# Allegro board pcb.brd
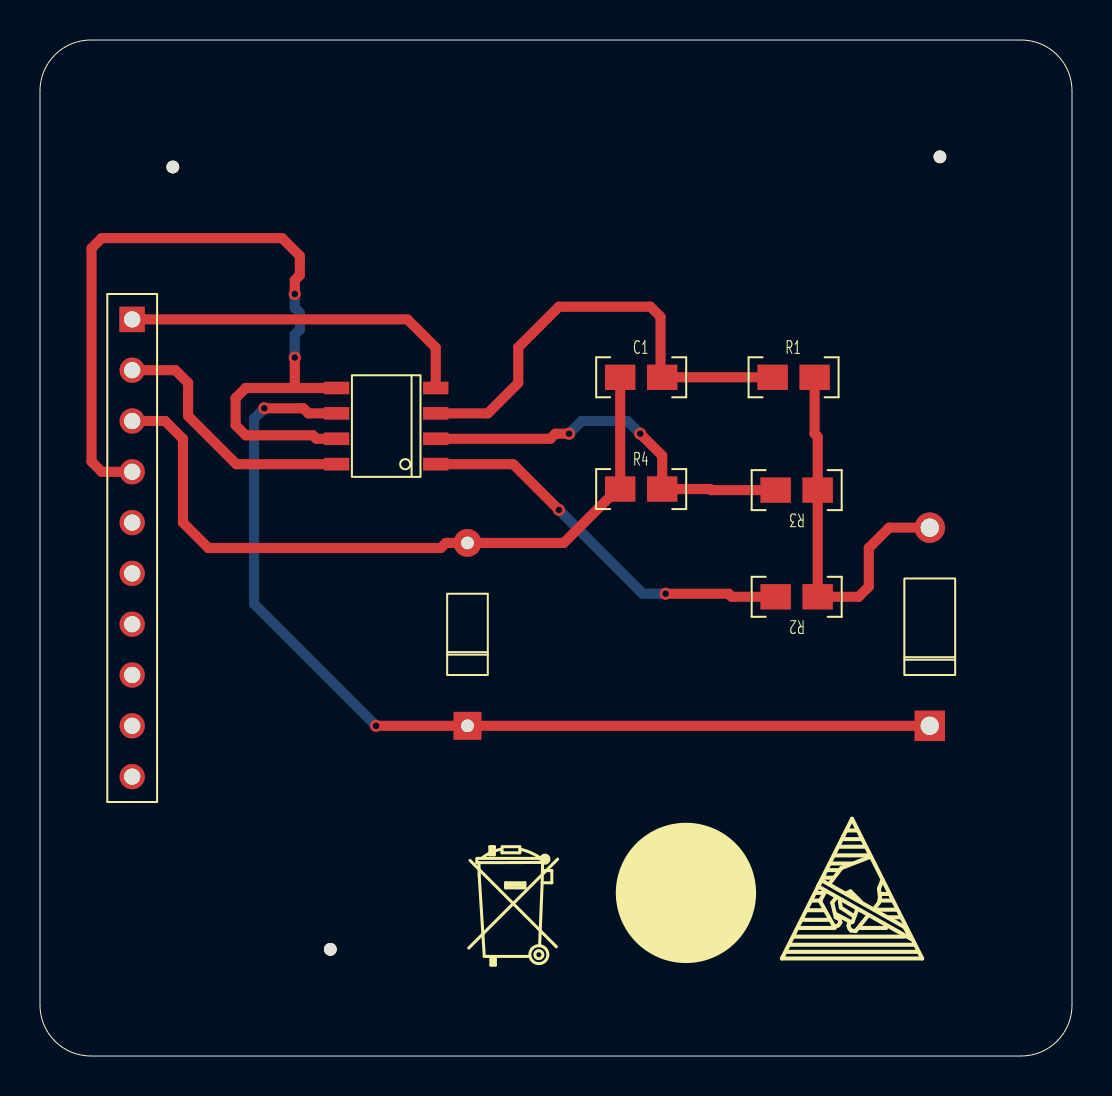
[diagram p0: board, top side]
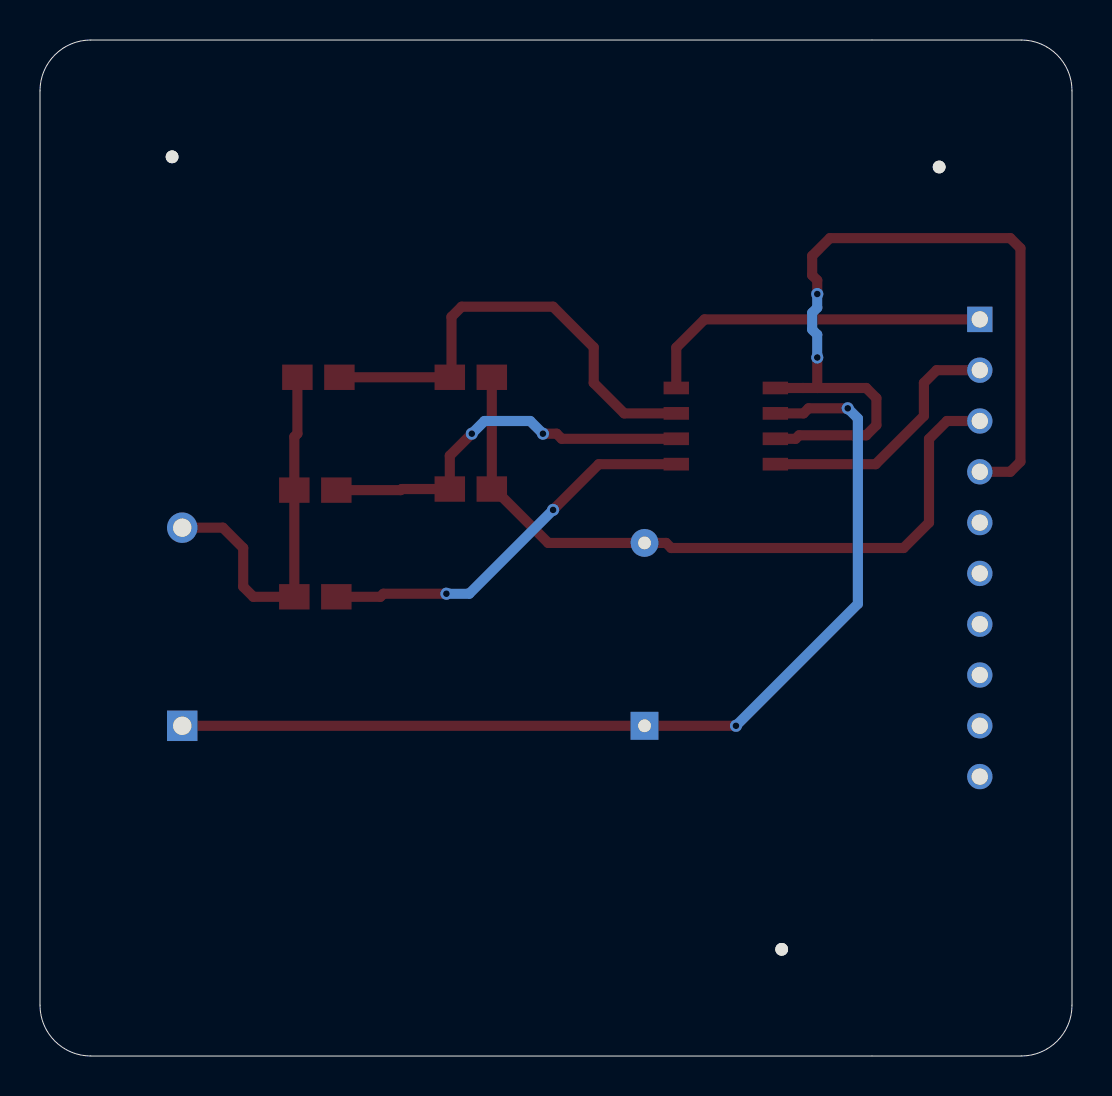
[diagram p1: board, bottom side, seen from below]

Outline 51.6 x 50.8 mm; copper layers: TOP, BOTTOM. Coordinates in mm from the lower left corner of the outline.
Outline path: 0,48.26 arc(0.74,50.06) 2.54,50.8 49.06,50.8 arc(50.86,50.06) 51.6,48.26 51.6,2.54 arc(50.86,0.74) 49.06,0 2.54,0 arc(0.74,0.74) 0,2.54 0,48.26

## Placement (name value [footprint] x y rotation side)
C1  0.1u  [0805]  30.01 34.04 0 top
D1  D1N5819/ON  [DO41-1]  44.49 16.51 0 top
D2  1n5231/ON  [DO35-1]  21.37 16.51 0 top
J1  HEADER 10  [666]  4.61 36.83 0 top
NOREF  -  []  26.2 7.62 0 top
NOREF#2  -  [unnamed#2]  45 44.96 0 top
NOREF#3  -  []  39.92 7.87 0 top
NOREF#4  -  [unnamed#2]  14.52 5.33 0 top
NOREF#5  -  []  32.8 8.38 0 top
NOREF#6  -  [unnamed#2]  6.64 44.45 0 top
R1  4.7k  [0805]  37.63 34.04 0 top
R2  330  [0805]  37.88 22.86 180 top
R3  100k  [0805]  37.88 28.19 180 top
R4  125591  [0805]  30.01 28.45 0 top
U1  LM2904  [SOIC8]  17.31 31.5 180 top

## Library data of the parts
C1 = C
D1 = D1N5819/ON_0
D2 = 1n5231/ON_1
J1 = HEADER 10
R1-R4 = R
U1 = LM2904: Tolerance: ***; User Part Number: ***

## Footprints (pads in the part's own frame, mm; a bottom-side part is the same pattern mirrored in y, then rotated)
666
  rect 1.27x1.27 hole 0.813: 1(0,0)
  round 1.27 hole 0.813: 2(0,-2.54) 3(0,-5.08) 4(0,-7.62) 5(0,-10.16) 6(0,-12.7) 7(0,-15.24) 8(0,-17.78) 9(0,-20.32) 10(0,-22.86)
0805
  rect 1.524x1.27 smd: 1(-1,-0.1) 2(1.1,-0.1)
DO35-1
  round 1.397 hole 0.635: 1(0,9.144)
  rect 1.397x1.397 hole 0.635: 2(0,0)
DO41-1
  round 1.524 hole 0.914: 1(0,9.906)
  rect 1.524x1.524 hole 0.914: 2(0,0)
SOIC8
  rect 1.27x0.635 smd: 1(-2.477,1.905) 2(-2.477,0.635) 3(-2.477,-0.635) 4(-2.477,-1.905) 5(2.477,-1.905) 6(2.477,-0.635) 7(2.477,0.635) 8(2.477,1.905)
unnamed#2
  round 0.635 hole 3.175 unplated: (0,0)

## Nets
0: C1.1 D2.1 J1.3 R4.1
+7.5: J1.1 U1.4(V-)
-7.5: J1.2 U1.8(V+)
OUT_800HZ: J1.4 U1.5(+IN) U1.7(OUT)
N64431: C1.2 R1.1 U1.3(+IN)
N64483: R3.2 R4.2 U1.2(-IN)
N64493: D1.1 R1.2 R2.1 R3.1
N64497: D1.2 D2.2 U1.6(-IN)
N64667: J1.5
N64673: J1.6
N64679: J1.7
N64685: J1.8
N64691: J1.9
N64697: J1.10
N65470: R2.2 U1.1(OUT)

## Via types
v1: diameter 0.61, hole 0.33, TOP to BOTTOM, 8 vias

## Routing (per net, layer and track width the routed paths; a pad name or vN(x,y) marks a point on that pad's centre or on a via; arc(x,y) is an arc through that point)
0: length 36.3
  TOP w0.508: C1.1 R4.1 28.88,28.35 26.19,25.65 D2.1 20.29,25.65 20.04,25.4 8.42,25.4 7.15,26.67 7.15,30.85 6.25,31.75 J1.3
+7.5: length 17.8
  TOP w0.508: U1.4 19.79,35.42 18.37,36.83 J1.1
-7.5: length 13.1
  TOP w0.508: J1.2 6.77,34.29 7.4,33.66 7.4,32 9.82,29.59 U1.8
OUT_800HZ: length 42.8
  TOP w0.508: U1.5 12.74,33.4 ; J1.4 3.09,29.21 2.58,29.72 2.58,40.39 3.09,40.89 12.1,40.89 12.99,40 12.99,39.04 12.74,38.79 v1(12.74,38.1) ; 12.74,33.4 v1(12.74,34.92) ; 12.74,33.4 10.29,33.4 9.78,32.89 9.78,31.54 10.29,31.04 13.64,31.04 13.82,30.86 U1.7
  BOTTOM w0.508: v1(12.74,34.92) 12.74,36.07 12.99,36.32 12.99,37.16 12.74,37.41 v1(12.74,38.1)
N64431: length 23.3
  TOP w0.508: R1.1 C1.2 31.03,34.02 31.03,36.96 30.52,37.46 25.95,37.46 23.91,35.43 23.91,33.66 22.39,32.13 U1.3
N64483: length 19.8
  TOP w0.508: R3.2 33.57,28.29 33.51,28.35 R4.2 31.11,30.01 v1(30.01,31.11) ; U1.2 25.51,30.86 25.77,31.11 v1(26.45,31.11)
  BOTTOM w0.508: v1(30.01,31.11) 29.38,31.75 27.09,31.75 v1(26.45,31.11)
N64493: length 19.2
  TOP w0.508: D1.1 42.46,26.42 41.44,25.4 41.44,23.47 40.93,22.96 R2.1 R3.1 38.88,30.96 38.73,31.11 R1.2
N64497: length 50
  TOP w0.508: v1(11.21,32.38) 13.17,32.38 13.42,32.13 U1.6 ; v1(16.8,16.51) D2.2 D1.2
  BOTTOM w0.508: v1(16.8,16.51) 10.71,22.61 10.71,31.88 v1(11.21,32.38)
N65470: length 19.7
  TOP w0.508: v1(31.28,23.11) 34.43,23.11 34.58,22.96 R2.2 ; v1(25.95,27.3) 23.66,29.59 U1.1
  BOTTOM w0.508: v1(25.95,27.3) 30.14,23.11 v1(31.28,23.11)

## Text on the board
DEVICE_TYPE_TOP: FIGURE | SIZE | 13.0 | 25.0 | 32.0 | 36.0 | 125.0 | DRILL CHART: TOP to BOTTOM | ALL UNITS ARE IN MILS | PLATED | NON-PLATED | QTY | 8 | 2 | 10 | 3
